# EAGLE board source_eagle (EAGLE 9.6.2)
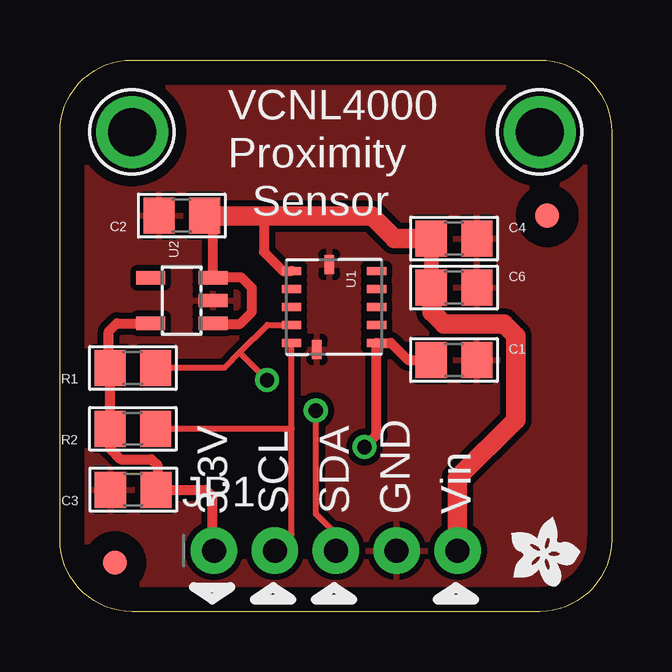
[diagram p0: board, top side]
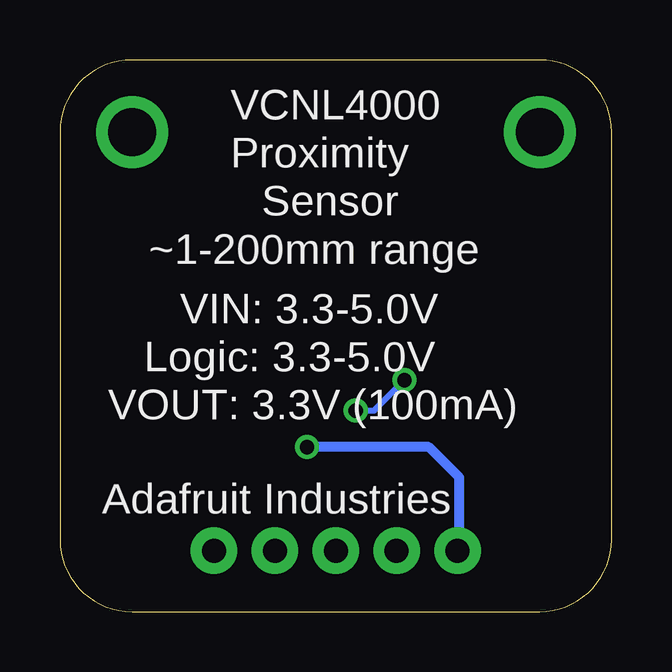
[diagram p1: board, bottom side, seen from below]

Size 23 x 23 mm. Coordinates in mm from the lower left corner, seen from the top.
Outline: 0,3 0,20 arc-90 3,23 20,23 arc-90 23,20 23,3 arc-90 20,0 3,0 arc-90 0,3
Copper layers (1*16): Top 0.035mm / dielectric 1.5mm / Bottom 0.035mm
Design rules "default *": minimum track width 10mil, minimum drill 19mil, track to track 8mil, track to pad 8mil, pad to pad 8mil, via to via 8mil, smd to smd 8mil, copper to edge 40mil, drill to drill 8mil, minimum pad ring 10mil, minimum via ring 8mil, stop-mask expansion 4mil, vias tented up to drill 24mil, thermal gap 10mil

## Footprints (pad centres in the part's own frame; a part is rotated, then mirrored left to right if it is on the bottom)
0805 = smd 1.3 x 1.5: 1 -0.95,0; 2 0.95,0
1X05_ROUND_76 = drill 1 pad 1.93: 1 -5.08,0; 2 -2.54,0; 3 0,0; 4 2.54,0; 5 5.08,0
VCNL4000 = smd 0.35 x 0.805: 1 -1.5,-1.772; 2 -0.75,-1.772; 3 0,-1.772; 4 0.75,-1.772; 5 1.5,-1.772; 7 1.5,1.772; 8 0.75,1.772; 9 0,1.772; 10 -0.75,1.772; 11 -1.5,1.772 | smd 0.805 x 0.4: 6 1.772,-0.715; 12 -1.772,-0.2
SOT23-5 = smd 0.55 x 1.2: 1 -0.95,-1.3; 2 0,-1.3; 3 0.95,-1.3; 4 0.95,1.3; 5 -0.95,1.3
MOUNTINGHOLE_2.0_PLATED = drill 2 pad 3: P$1 0,0
FIDUCIAL_1MM = smd 1 x 1: 1 0,0

## Placement (x,y rotation side)
C1  10uF  [0805]  16.43,10.49 0 top
C2  10uF  [0805]  5.08,16.51 180 top
C3  0.1uF  [0805]  3.06,5.08 180 top
C4  10uF  [0805]  16.43,15.55 0 top
C6  10uF  [0805]  16.43,13.51 0 top
JP1  [1X05_ROUND_76]  11.5,2.54 0 top
R1  10K  [0805]  3.04,10.16 180 top
R2  10K  [0805]  3.04,7.62 180 top
U1  VCNL4000-GS08  [VCNL4000]  11.43,12.7 270 top
U2  AP7311-33  [SOT23-5]  5.08,12.97 90 top
U$5  MOUNTINGHOLE2.0  [MOUNTINGHOLE_2.0_PLATED]  3,20 0 top
U$6  MOUNTINGHOLE2.0  [MOUNTINGHOLE_2.0_PLATED]  20,20 0 top
U$7  FIDUCIAL  [FIDUCIAL_1MM]  20.32,16.51 0 top
U$8  FIDUCIAL  [FIDUCIAL_1MM]  2.29,2.03 0 top
U$13  [ADAFRUIT200MIL]  20.23,2.6 270 top

## Library data of the parts
C1-C4 C6 JP1 R1 R2 U1 U2 U$5 U$6 = microbuilder
U$7 U$8 U$13 = adafruit

## Nets
3.3V: C1.1 C3.1 JP1.1 R1.2 R2.2 U1.7 U2.5
GND: C1.2 C2.2 C3.2 C4.2 C6.2 JP1.4 U1.6 U1.12 U2.2
SCL: JP1.2 R2.1 U1.5
SDA: JP1.3 R1.1 U1.4
VCC: C2.1 C4.1 C6.1 JP1.5 U1.1 U2.1 U2.3

## Tracks (layer width: path | path; a pad name or v marks a point on that pad's centre or on a via)
3.3V  (via drill 0.6)
  Top 0.406: C1.1 14.5,10.5 13.8,11.2 U1.7 13.2,7.36 v12.7,6.86 | U2.5 2.37,12.02 2.03,11.68 2.03,10.22 R1.2 R2.2 2.09,6.8 2.54,6.35 3.81,6.35 4.06,6.1 4.06,5.14 C3.1 6.1,5.08 6.35,4.83 6.35,2.61 JP1.1
  Bottom 0.406: v12.7,6.86 7.62,6.86 6.35,5.59 6.35,2.61 JP1.1
GND
  pour Top (isolate 0.254): 0,23 23,23 23,0 0,0
SCL
  Top 0.254: 9.66,7.62 9.66,3.24 JP1.2 | 9.66,7.62 U1.5 | 9.66,7.62 R2.1
SDA  (via drill 0.6)
  Top 0.254: U1.4 8.65,11.95 7.49,10.79 | 7.49,10.79 6.86,10.16 R1.1 | JP1.3 11.5,3.23 10.67,4.06 v10.67,8.38 | v8.64,9.65 7.49,10.79
  Bottom 0.254: v10.67,8.38 9.91,8.38 v8.64,9.65
VCC
  Top 0.406: U2.1 6.4,12 7.5,12 8,12.5 8,13.5 7.58,13.92 U2.3 6.38,16.16 C2.1 | U1.1 9.3,14.2 8.5,15 8.5,16.5
  Top 0.61: C4.1 C6.1
  Top 0.813: JP1.5 16.58,5.58 19,8 19,11.5 18.5,12 16,12 15.5,12.5 15.5,13.49 C6.1 | C4.1 13.95,15.55 13,16.5 8.5,16.5 C2.1

## Text on the board
tPlace: VCNL4000 | Proximity | Sensor | 3.3V | SCL | SDA | GND | Vin
bPlace: VCNL4000 | Proximity | Sensor | ~1-200mm range | VIN: 3.3-5.0V | Logic: 3.3-5.0V | VOUT: 3.3V (100mA) | Adafruit Industries